# Altium PCB 峰值检测.pcbdoc
Units mil, origin at the board's own origin, x right, y up, seen from the top; angles counter-clockwise.
Board outline 2424 x 2310 mil, 2 copper layers (Top Layer, Bottom Layer); 13 components, 9 nets, 27 pads, 0 vias.
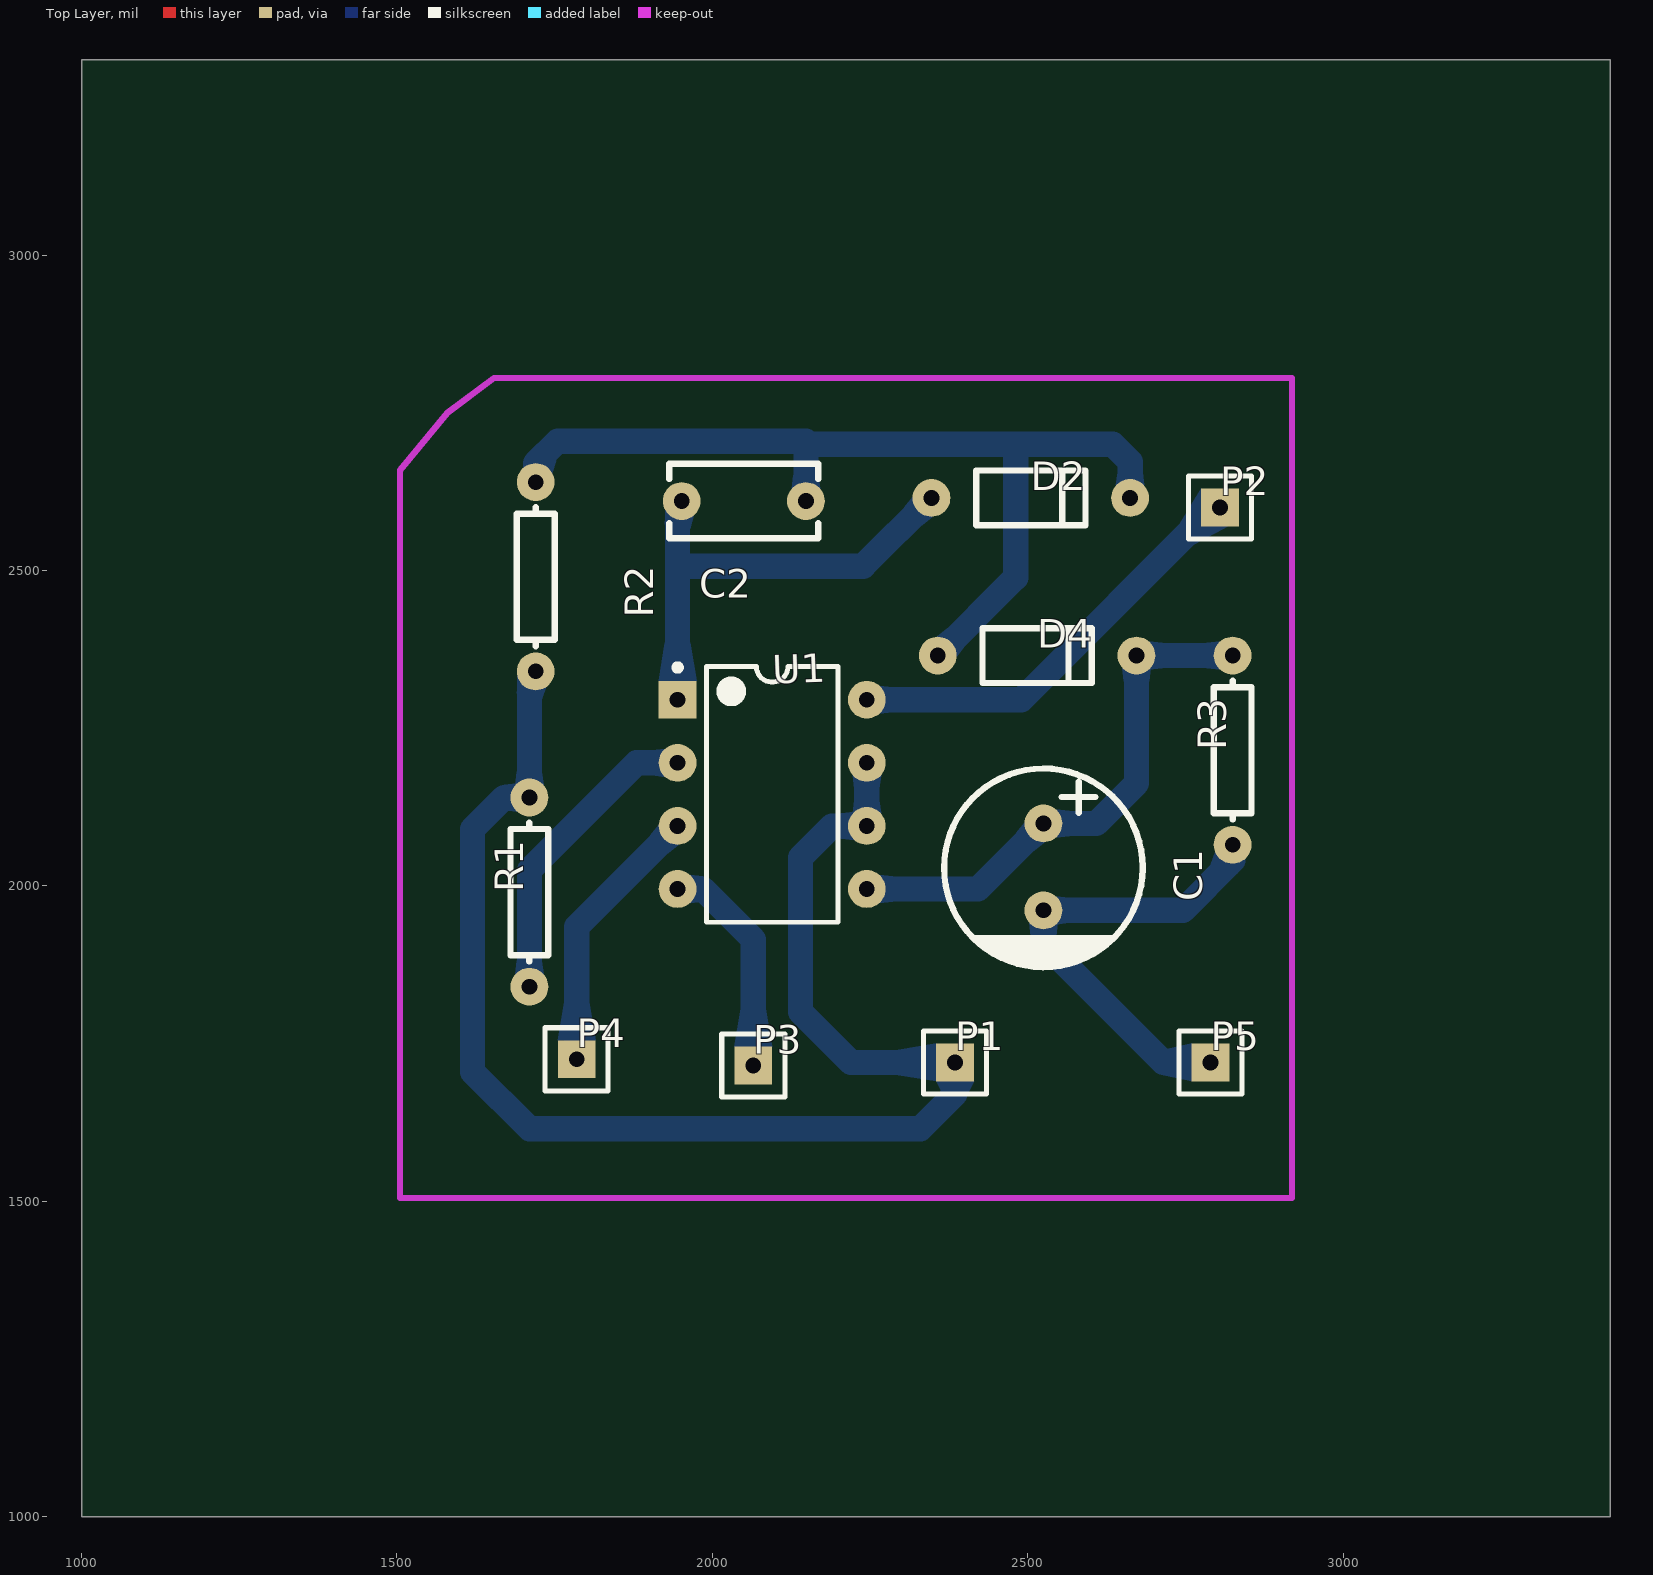
[diagram p0: Top Layer view]
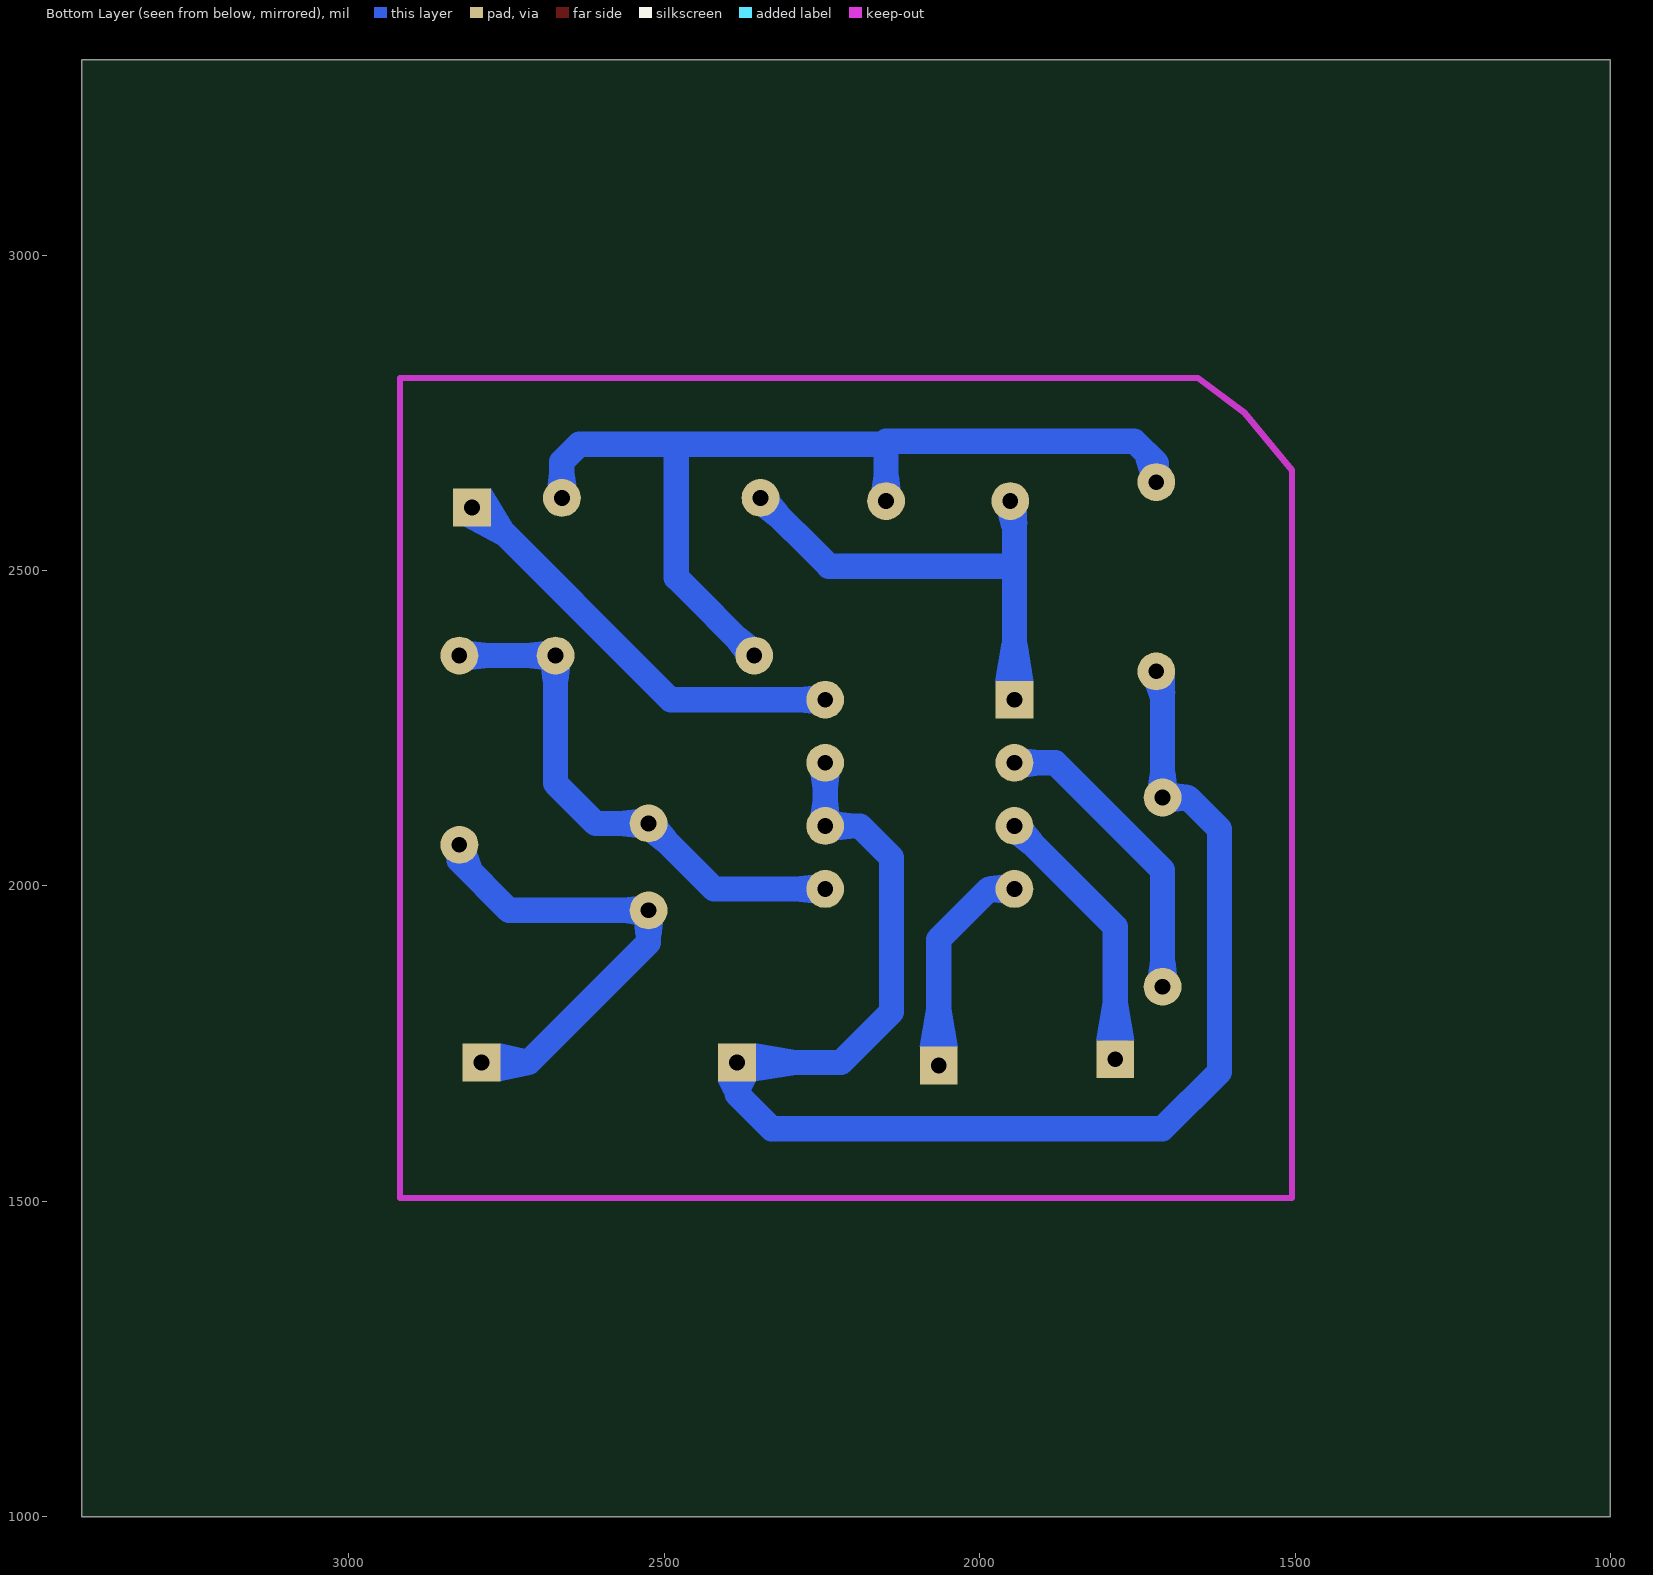
[diagram p1: Bottom Layer view, seen from below]

## Layer stack, top to bottom
Top Layer: signal copper (thickness not stored)
Dielectric: dielectric 12.6, FR-4, Dk 4.8
Bottom Layer: signal copper (thickness not stored)

## Board outline
3424,1000 1000,1000 1000,3310 3424,3310

## Components (designator, comment, footprint, x,y, rotation, side; value= is the part's Value field where it differs from the comment)
C1 "10uF" CAP-TH_BD8.0-P3.50-D1.0-FD 2525,2030 r270 top
C2 "10nf" CAP-TH_L6.0-W3.0-P5.00-D1.0 2050,2610 r180 top
D2 "1N4148" DO-35_BD2.0-L4.0-P8.00-D0.5-FD 2505,2615 r0 top
D4 "1N4148" DO-35_BD2.0-L4.0-P8.00-D0.5-FD 2515,2365 r0 top
P1 "Header-Male-2.54_1x1" HDR-1X1/2.54 2385,1720 r0 top
P2 "Header-Male-2.54_1x1" HDR-1X1/2.54 2805,2600 r0 top
P3 "Header-Male-2.54_1x1" HDR-1X1/2.54 2065,1715 r0 top
P4 "Header-Male-2.54_1x1" HDR-1X1/2.54 1785,1725 r0 top
P5 "Header-Male-2.54_1x1" HDR-1X1/2.54 2790,1720 r0 top
R1 "20k" AXIAL-0.3 1710,1990 r90 top
R2 "10k" AXIAL-0.3 1720,2490 r270 top
R3 "1k" AXIAL-0.3 2825,2215 r90 top
U1 "LM358AN" DIP-8_LS7.62-L9.78-W6.60-PITCH2.54 2095,2145 r0 top

## Footprints (in the part's own frame and the unit in brackets; to place one, negate y for a bottom-side part, rotate by r counter-clockwise, add the part's x,y. Pads: shape width x height; smd on the part's side, far side on the other; paste and mask are expansions set on the pad)
AXIAL-0.3 [mil]
  round 60 hole 25: 1(-150,0) 2(150,0)
  silkscreen extent -110,-30 110,30
CAP-TH_BD8.0-P3.50-D1.0-FD [mil]
  round 60 hole 25: 1(-68.9,0) 2(68.9,0)
  silkscreen extent -156,-157 159,157
CAP-TH_L6.0-W3.0-P5.00-D1.0 [mil]
  round 60 hole 25: 1(-98.42,0) 2(98.42,0)
  silkscreen extent -118,-59 118,59
DIP-8_LS7.62-L9.78-W6.60-PITCH2.54 [mil]
  rect 60x60 hole 25: 1(-150,150)
  round 60 hole 25: 2(-150,50) 3(-150,-50) 4(-150,-150) 5(150,-150) 6(150,-50) 7(150,50) 8(150,150)
  silkscreen extent -155,-203 104,206
DO-35_BD2.0-L4.0-P8.00-D0.5-FD [mil]
  round 60 hole 25: 1(-157.48,0) 2(157.48,0)
  silkscreen extent -87,-43 87,43
HDR-1X1/2.54 [mil]
  rect 60x60 hole 25: 1(0,0)
  silkscreen extent -50,-50 50,50

## Nets (pads, with @x,y where several pads share a name; then routed paths per layer and width w, separated by ;. In a path a pad name is that pad's centre, name@x,y a point inside that pad or via, vN(x,y) a via of type N, cw(c..) or ccw(c..) an arc to the next point about the centre after c; other vN are vias at no path point)
D2_2: C2.1 D2.2 D4.1 R2.1 | length 1627.1
  Bottom Layer w40: R2.1 1720,2670 1755,2705 2148.4,2705 C2.1 2148.4,2700 2635,2700 2662.5,2672.5 D2.2 ; D4.1 2481.07,2488.55 2481.07,2700
GND: C1.2 P5.1 R3.1 | length 752.5
  Bottom Layer w40: P5.1 2715,1720 2525,1910 C1.2 2746.1,1961.1 2825,2040 R3.1
U1_1: C2.2 D2.1 U1.1 | length 765.1
  Bottom Layer w40: U1.1 1945,2603.43 C2.2 ; 1945,2506.78 2239.3,2506.78 D2.1
U1_2: R1.1 U1.2 | length 490.4
  Bottom Layer w40: R1.1 1710,2025 1880,2195 U1.2
U1_3: P4.1 U1.3 | length 436.3
  Bottom Layer w40: P4.1 1785,1935 U1.3
U1_4: P3.1 U1.4 | length 353.1
  Bottom Layer w40: U1.4 1985,1995 2065,1915 P3.1
U1_5: C1.1 D4.2 R3.2 U1.5 | length 851.9
  Bottom Layer w40: U1.5 2421.1,1995 C1.1 2608.9,2098.9 2672.5,2162.5 D4.2 R3.2
U1_6: P1.1 R1.2 R2.2 U1.6 U1.7 | length 2323.8
  Bottom Layer w40: R2.2 1710,2330 R1.2 1670,2140 1620,2090 1620,1705 1710,1615 2330,1615 2385,1670 P1.1 2220,1720 2140,1800 2140,2045 2190,2095 U1.6 U1.7
U1_8: P2.1 U1.8 | length 686.3
  Bottom Layer w40: U1.8 2490,2295 2795,2600 P2.1

## Other copper
Bottom Layer:
  region net U1_1: 2317.58,2616.88 2349.4,2585.06 2332.78,2571.98 2304.5,2600.26
  region net D2_2: 2684.99,2634.83 2639.99,2634.85 2642.5,2655.85 2682.5,2655.83
  region net D2_2: 2355.64,2394.94 2387.46,2363.12 2400.54,2379.74 2372.26,2408.02
  region net U1_5: 2694.99,2345.17 2649.99,2345.15 2652.5,2324.15 2692.5,2324.17
  region net U1_5: 2692.32,2342.5 2692.32,2387.5 2713.32,2385 2713.32,2345
  region net U1_2: 1732.5,1859.84 1687.5,1859.84 1690,1880.84 1730,1880.84
  region net U1_6: 1732.5,2159.84 1687.5,2159.84 1690,2180.84 1730,2180.84
  region net U1_6: 1690.16,2117.5 1690.16,2162.5 1670,2160 1670,2120
  region net D2_2: 1702.84,2664.61 1746.56,2653.95 1752.42,2674.13 1706.94,2685.23
  region net U1_6: 1736.96,2315.25 1693.33,2326.27 1690,2305.45 1730,2295.35
  region net GND: 2547.5,1941.26 2502.5,1941.26 2505,1920.26 2545,1920.26
  region net GND: 2544.84,1938.6 2544.84,1983.6 2565.84,1981.1 2565.84,1941.1
  region net U1_5: 2544.84,2076.4 2544.84,2121.4 2565.84,2118.9 2565.84,2078.9
  region net U1_5: 2495.06,2100.78 2526.88,2068.96 2510.26,2055.88 2481.98,2084.16
  region net U1_5: 2264.84,1972.5 2264.84,2017.5 2285.84,2015 2285.84,1975
  region net U1_6: 2225.16,2072.5 2225.16,2117.5 2204.16,2115 2204.16,2075
  region net U1_6: 2267.5,2114.84 2222.5,2114.84 2225,2135.84 2265,2135.84
  region net U1_6: 2267.5,2175.16 2222.5,2175.16 2225,2154.16 2265,2154.16
  region net U1_8: 2264.84,2272.5 2264.84,2317.5 2285.84,2315 2285.84,2275
  region net U1_4: 1964.84,1972.5 1964.84,2017.5 1985,2015 1985,1975
  region net U1_3: 1915.06,2096.88 1946.88,2065.06 1930.26,2051.98 1901.98,2080.26
  region net U1_2: 1925.16,2172.5 1925.16,2217.5 1904.16,2215 1904.16,2175
  region net U1_1: 1970.59,2586.79 1926.18,2594.04 1925,2572.96 1965,2566.42
  region net D2_2: 2170.91,2629.85 2125.91,2629.83 2128.4,2650.83 2168.4,2650.85
  region net D2_2: 2170.91,2629.85 2125.91,2629.83 2128.4,2650.83 2168.4,2650.85
  region net GND: 2839.65,2038.82 2797.2,2053.73 2790.53,2033.82 2832.4,2019.11
  region net U1_5: 2805.16,2342.5 2805.16,2387.5 2784.16,2385 2784.16,2345
  region net U1_6: 2355,1690 2355,1750 2295,1740 2295,1700
  region net U1_6: 2415,1690 2355,1690 2365,1670 2405,1670
  region net U1_8: 2818.1,2570 2775,2630 2741.08,2574.37 2764.73,2541.45
  region net U1_4: 2035,1745 2095,1745 2085,1805 2045,1805
  region net U1_3: 1755,1755 1815,1755 1805,1815 1765,1815
  region net GND: 2760,1690 2760,1750 2715,1740 2715,1700
  region net U1_1: 1915,2325 1975,2325 1965,2385 1925,2385

## Silkscreen, mask and mechanical layers (free items; w line width, h text height)
Document:
  lines w0.1: 2211,2154 2213,2156